# Allegro board layout1.brd
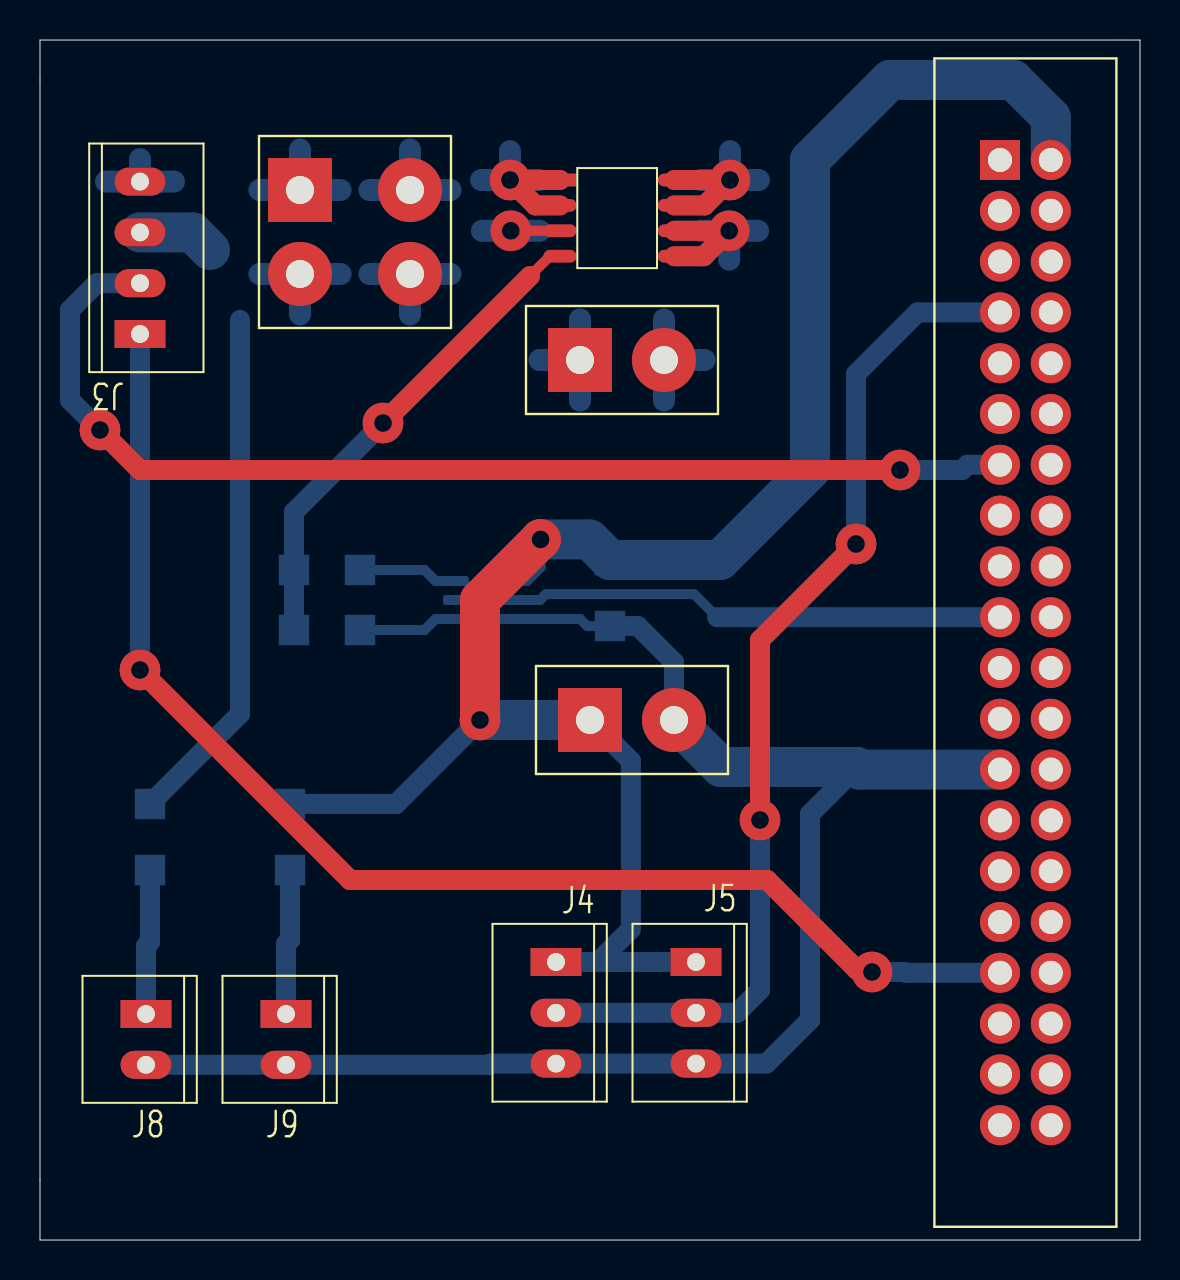
[diagram p0: board, top side]
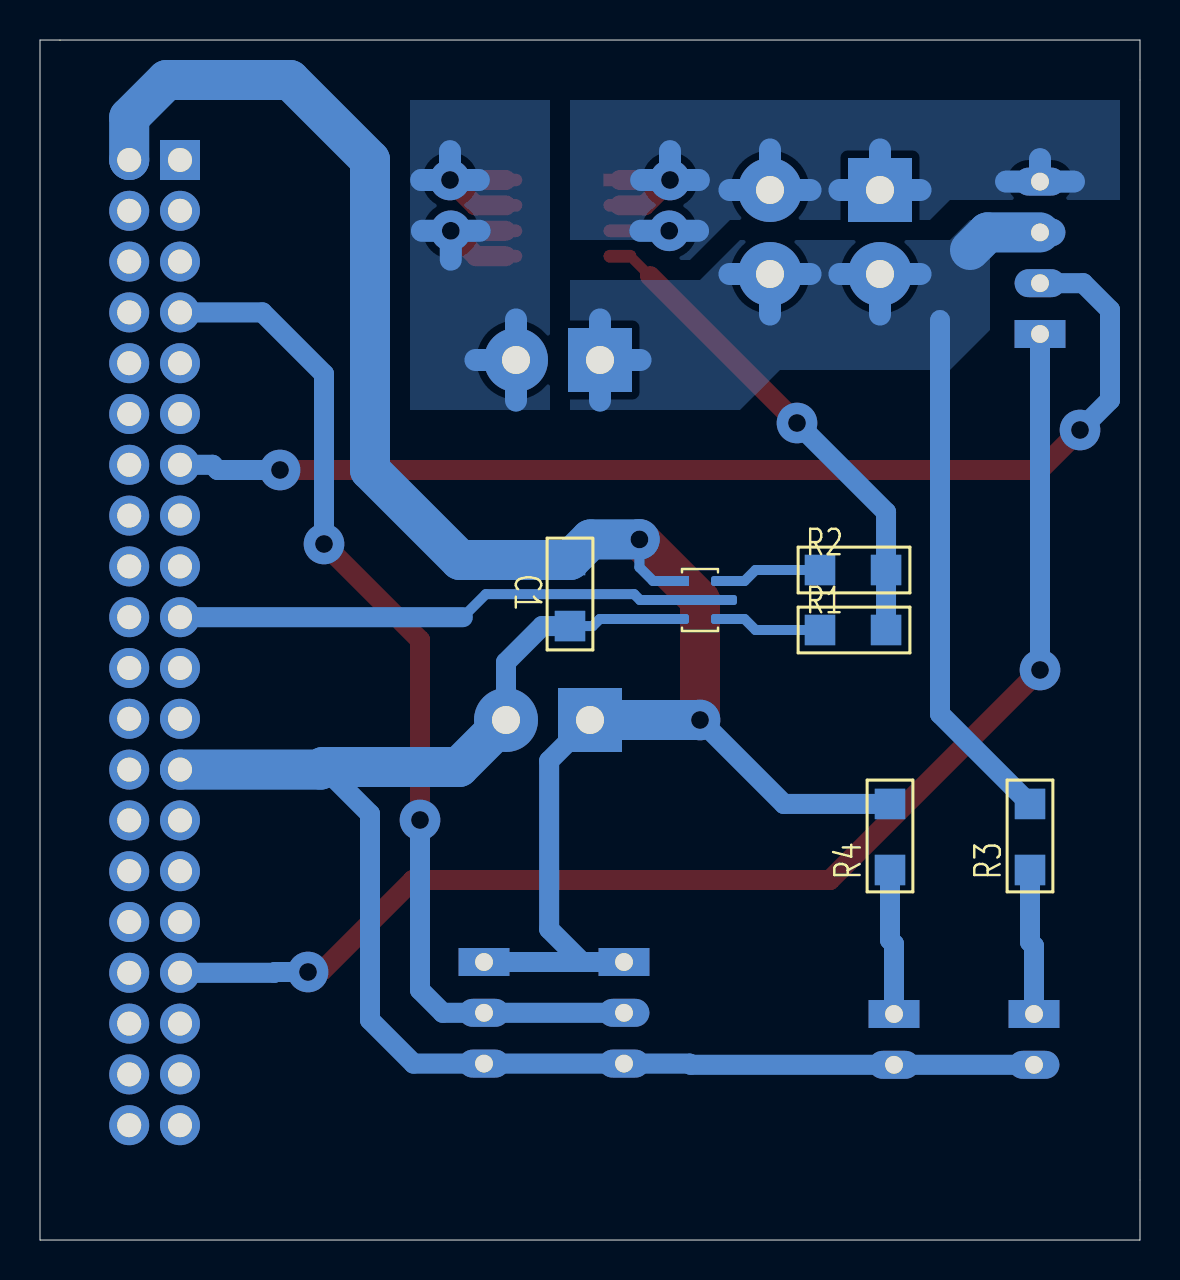
[diagram p1: board, bottom side, seen from below]

Outline 55 x 60 mm; copper layers: TOP, BOTTOM. Coordinates in mm from the lower left corner of the outline.
Outline path: 0,60 55,60 55,0 0,0 0,60

## Design rules (mm)
constraint set DEFAULT: min track width 0.1

## Placement (name value [footprint] x y rotation side)
C1  100 nF  [GU-C1206]  28.5 34 270 bottom
J1  RPI GPIO  [SHDRV40W64P254_20X2_5842X910-1]  48 54 270 top
J2  Heater  [RHDRV2W140P420_550_2X1_960X5-1]  27 44 0 top
J3  PWM Fan  [GU-MOLEX4]  5 45.3 180 top
J4  Temp Sensor 1  [GU-MOLEX3]  25.8 13.9 0 top
J5  Temp Sensor 2  [GU-MOLEX3]  32.8 13.9 0 top
J6  12V Power  [RHDRV4W140P420_550_2X2_960X9-1]  13 52.5 270 top
J7  5V Power  [RHDRV2W140P420_550_2X1_960X5-1]  27.5 26 0 top
J8  12V LED  [GU-MOLEX2]  5.3 11.3 0 top
J9  5V LED  [GU-MOLEX2]  12.3 11.3 0 top
R1  10  [GU-C1206]  16 30.5 180 bottom
R2  10  [GU-C1206]  16 33.5 180 bottom
R3  R  [GU-C1206]  5.5 18.5 90 bottom
R4  R  [GU-C1206]  12.5 18.5 90 bottom
U1  TSM4806  [GU-SOIC8]  26 53 0 top
U2  ZXGD3003E6TA  [SOT23-6P95_270X145L35X42]  22 32 270 bottom

## Library data of the parts
C1 = CAPACITOR NON-POL
J1 = HEADER 20X2
J2 J7-J9 = HEADER 2
J3 J6 = HEADER 4
J4 J5 = HEADER 3
R1-R4 = R
U1 = TSM4806
U2 = ZXGD3003E6TA

## Footprints (pads in the part's own frame, mm; a bottom-side part is the same pattern mirrored in y, then rotated)
GU-C1206
  rect 1.524x1.524 smd: 1(0,0) 2(3.302,0)
GU-MOLEX2
  rect 2.54x1.397 hole 0.889: 1(0,0)
  oval 2.54x1.397 hole 0.889: 2(0,-2.54)
GU-MOLEX3
  rect 2.54x1.397 hole 0.889: 1(0,0)
  oval 2.54x1.397 hole 0.889: 2(0,-2.54) 3(0,-5.08)
GU-MOLEX4
  rect 2.54x1.397 hole 0.889: 1(0,0)
  oval 2.54x1.397 hole 0.889: 2(0,-2.54) 3(0,-5.08) 4(0,-7.62)
GU-SOIC8
  rect 1.651x0.635 smd: 1(0,0)
  oval 1.651x0.635 smd: 2(0,-1.27) 3(0,-2.54) 4(0,-3.81) 5(5.715,-3.81) 6(5.715,-2.54) 7(5.715,-1.27) 8(5.715,0)
RHDRV2W140P420_550_2X1_960X5-1
  rect 3.2x3.2 hole 1.4: 1(0,0)
  round 3.2 hole 1.4: 2(4.2,0)
RHDRV4W140P420_550_2X2_960X9-1
  rect 3.2x3.2 hole 1.4: 1(0,0)
  round 3.2 hole 1.4: 2(0,5.5) 3(4.2,0) 4(4.2,5.5)
SHDRV40W64P254_20X2_5842X910-1
  rect 2x2 hole 1.2: 1(0,0)
  round 2 hole 1.2: 2(0,2.54) 3(2.54,0) 4(2.54,2.54) 5(5.08,0) 6(5.08,2.54) 7(7.62,0) 8(7.62,2.54) 9(10.16,0) 10(10.16,2.54) 11(12.7,0) 12(12.7,2.54) 13(15.24,0) 14(15.24,2.54) 15(17.78,0) 16(17.78,2.54) 17(20.32,0) 18(20.32,2.54) 19(22.86,0) 20(22.86,2.54) 21(25.4,0) 22(25.4,2.54) 23(27.94,0) 24(27.94,2.54) 25(30.48,0) 26(30.48,2.54) 27(33.02,0) 28(33.02,2.54) 29(35.56,0) 30(35.56,2.54) 31(38.1,0) 32(38.1,2.54) 33(40.64,0) 34(40.64,2.54) 35(43.18,0) 36(43.18,2.54) 37(45.72,0) 38(45.72,2.54) 39(48.26,0) 40(48.26,2.54)
SOT23-6P95_270X145L35X42
  rect 0.5x1.3 smd: 1(-0.95,-1.2)
  rrect 0.5x1.3 smd: 2(0,-1.2) 3(0.95,-1.2) 4(0.95,1.2) 5(0,1.2) 6(-0.95,1.2)

## Nets
5V: C1.1 J1.2 J4.1 J5.1 J7.1 R4.2 U2.1(VCC)
12V: J2.1 J3.3 J6.3 J6.4 R3.2
GND: C1.2 J1.25 J4.3 J5.3 J7.2 J8.2 J9.2 U2.3
GND2: J3.4 J6.1 J6.2 U1.1 U1.2 U1.3(SOURCE 3)
DQ: J1.7 J4.2 J5.2
HEAT_CTL: J1.19 U2.2 U2.5
PWM: J1.33 J3.1
SENSOR: J1.13 J3.2
N02447: R1.2 R2.2 U1.4
N02727: R2.1 U2.6
N02741: R1.1 U2.4
N03519: J2.2 U1.5 U1.6 U1.7 U1.8
N04154: J8.1 R3.1
N04438: J9.1 R4.1

Pads without a net: J1 1 3 4 5 6 8 9 10 11 12 14 15 16 17 18 20 21 22 23 24 26 27 28 29 30 31 32 34 35 36 37 38 39 40

## Via types
v1: diameter 2.032, hole 0.889, TOP to BOTTOM, 13 vias

## Routing (per net, layer and track width the routed paths; a pad name or vN(x,y) marks a point on that pad's centre or on a via; arc(x,y) is an arc through that point)
5V: length 99
  TOP w2: v1(25.03,35.03) 22,32 v1(22,26)
  BOTTOM w0.5: U2.1 24.34,32.95 25.03,33.64 v1(25.03,35.03)
  BOTTOM w1: 27.9,13.9 29.54,15.54 29.54,23.96 J7.1 ; 27.9,13.9 J4.1 ; 27.9,13.9 J5.1 ; v1(22,26) 17.8,21.8 R4.2
  BOTTOM w2: J7.1 v1(22,26) ; J1.2 50.54,56.13 48.67,58 42.5,58 38.5,54 38.5,38.5 34,34 C1.1 27.47,35.03 v1(25.03,35.03)
12V: length 48.2
  BOTTOM w1: R3.2 10,26.3 10,46
  BOTTOM w1.1: 13,46.27 J6.3 ; J6.3 10.97,48.3 ; J6.3 15.03,48.3 ; 24.97,44 J2.1 ; J2.1 27,41.97 ; J2.1 27,46.03 ; J6.4 20.53,48.3 ; J6.4 16.47,48.3 ; J6.4 18.5,46.27
  BOTTOM w2: 8.5,49.5 7.62,50.38 J3.3
GND: length 77.4
  BOTTOM w0.5: U2.3 27.01,31.05 27.36,30.7 C1.2
  BOTTOM w1: 40.85,23.65 38.5,21.3 38.5,11 36.32,8.82 J5.3 J4.3 22.52,8.82 22.46,8.76 J9.2 J8.2 ; C1.2 29.89,30.7 31.7,28.89 J7.2
  BOTTOM w2: J1.25 40.98,23.52 40.85,23.65 34.05,23.65 J7.2
GND2: length 31.9
  TOP w0.5: U1.3 v1(23.54,50.46)
  TOP w1: U1.2 24.77,51.73 v1(23.5,53) U1.1
  BOTTOM w1.1: J6.2 20.53,52.5 ; J6.2 16.47,52.5 ; J6.2 18.5,54.53 ; J3.4 5,54.05 ; J3.4 3.3,52.92 ; J3.4 6.7,52.92 ; 22.06,53 v1(23.5,53) ; v1(23.5,53) 23.5,54.44 ; v1(23.5,53) 24.94,53 ; 22.1,50.46 v1(23.54,50.46) 24.98,50.46 ; J6.1 15.03,52.5 ; J6.1 10.97,52.5 ; J6.1 13,54.53
DQ: length 51.9
  TOP w1: v1(40.8,34.8) 36,30 v1(36,21)
  BOTTOM w1: v1(40.8,34.8) 40.8,43.3 43.88,46.38 J1.7 ; J4.2 J5.2 34.86,11.36 36,12.5 v1(36,21)
HEAT_CTL: length 27.8
  BOTTOM w0.5: 33.86,31.14 32.71,32.29 25.29,32.29 25,32 U2.2 U2.5
  BOTTOM w1: J1.19 33.86,31.14
PWM: length 66.1
  TOP w1: v1(41.6,13.4) 41.5,13.5 40.86,13.5 36.36,18 15.5,18 v1(5,28.5)
  BOTTOM w1: v1(41.6,13.4) 43.24,13.4 43.28,13.36 J1.33 ; J3.1 v1(5,28.5)
SENSOR: length 56.6
  TOP w1: v1(43,38.5) 5,38.5 v1(3,40.5)
  BOTTOM w1: J1.13 46.37,38.76 46.11,38.5 v1(43,38.5) ; J3.2 2.84,47.84 1.5,46.5 1.5,42 v1(3,40.5)
N02447: length 24.5
  TOP w0.5: 24.5,48.2 25.49,49.19 U1.4
  TOP w1: v1(17.15,40.85) 24.5,48.2
  BOTTOM w1: R1.2 R2.2 12.7,36.4 v1(17.15,40.85)
N02727: length 5
  BOTTOM w0.5: R2.1 19.22,33.5 19.77,32.95 U2.6
N02741: length 5
  BOTTOM w0.5: U2.4 19.77,31.05 19.22,30.5 R1.1
N03519: length 26.9
  TOP w1: U1.8 v1(34.5,53) 33.23,51.73 U1.7 ; U1.6 v1(34.46,50.46) 33.19,49.19 U1.5
  BOTTOM w1.1: v1(34.5,53) 35.94,53 ; v1(34.5,53) 34.5,54.44 ; v1(34.5,53) 33.06,53 ; 31.2,41.97 J2.2 ; J2.2 33.23,44 ; J2.2 31.2,46.03 ; 33.02,50.46 v1(34.46,50.46) ; v1(34.46,50.46) 35.9,50.46 ; v1(34.46,50.46) 34.46,49.02
N04154: length 7.3
  BOTTOM w1: J8.1 5.3,14.7 5.5,14.9 R3.1
N04438: length 7.3
  BOTTOM w1: J9.1 12.3,14.8 12.5,15 R4.1

## Copper pours and planes (outline as drawn; the poured copper is in the pictures)
12V on BOTTOM: 28.5,41.5 28.5,48 22,48 20,50 9.5,50 8.5,51 7.5,51 7.5,45.5 9.5,43.5 18,43.5 20,41.5
GND2 on BOTTOM: 28.5,57 28.5,50 25,50 24,49 22.5,49 20.5,51 10.5,51 9.5,52 1,52 1,57
N03519 on BOTTOM: 29.5,57 29.5,41.5 36.5,41.5 36.5,57
